# EAGLE board Fan-Module_40mm (EAGLE 9.2.2)
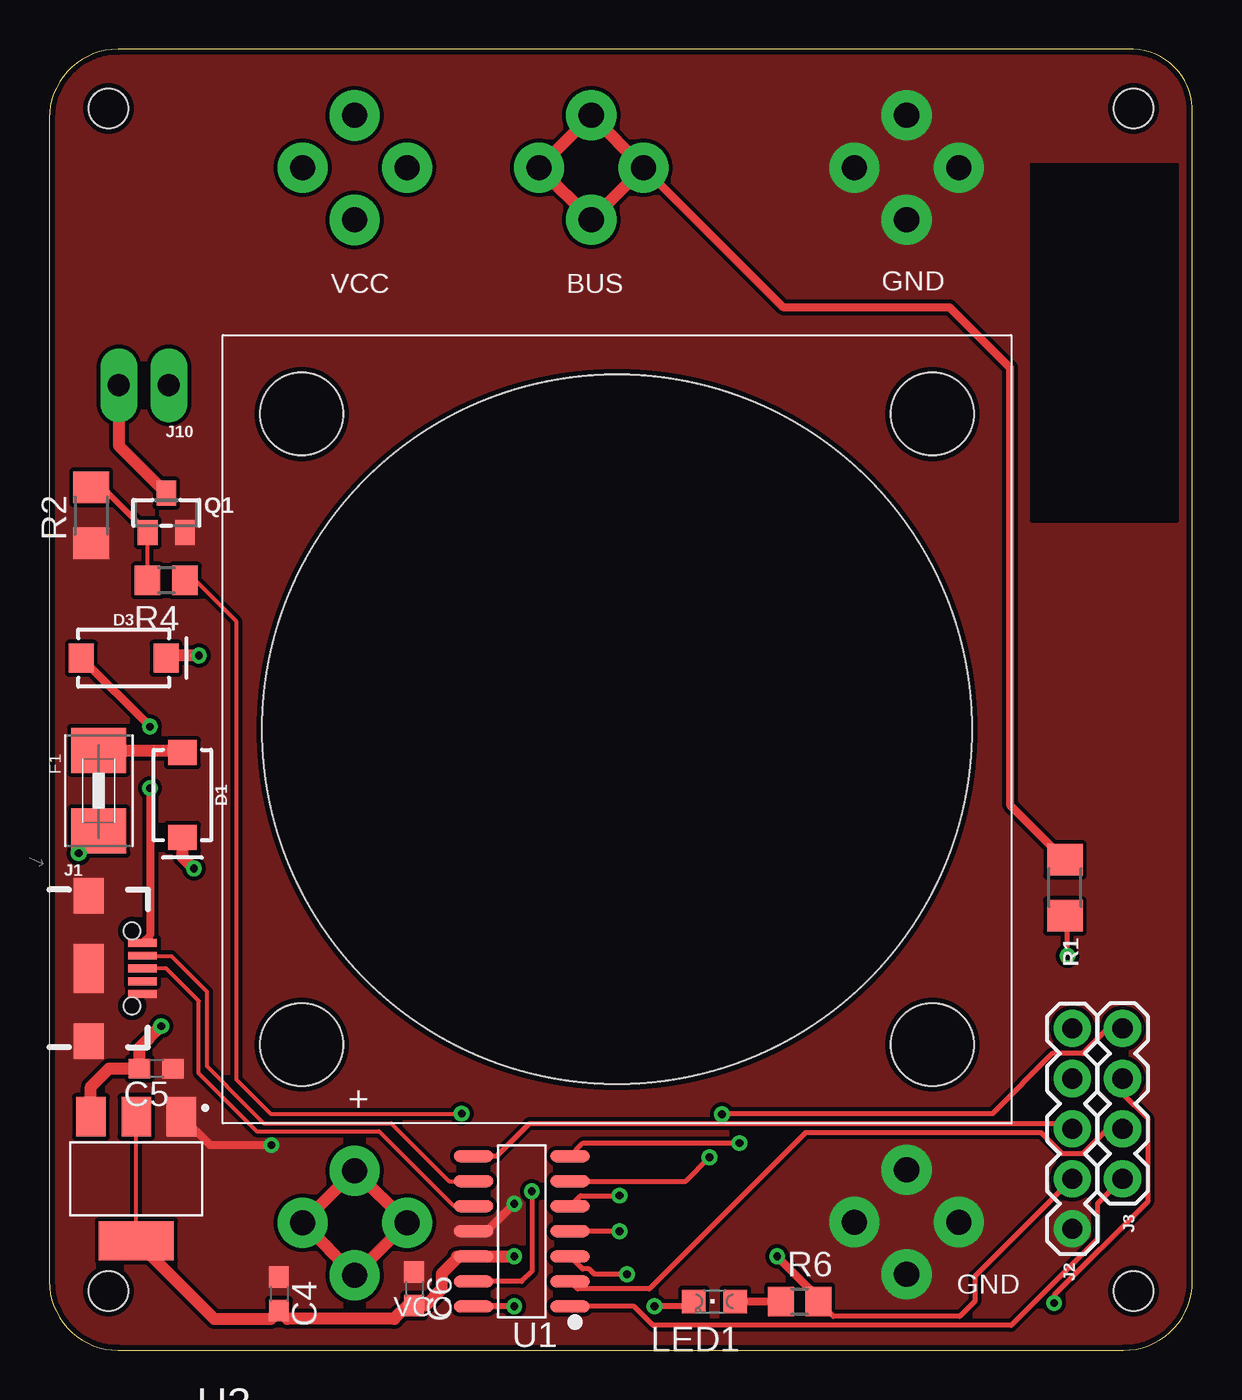
[diagram p0: board, top side]
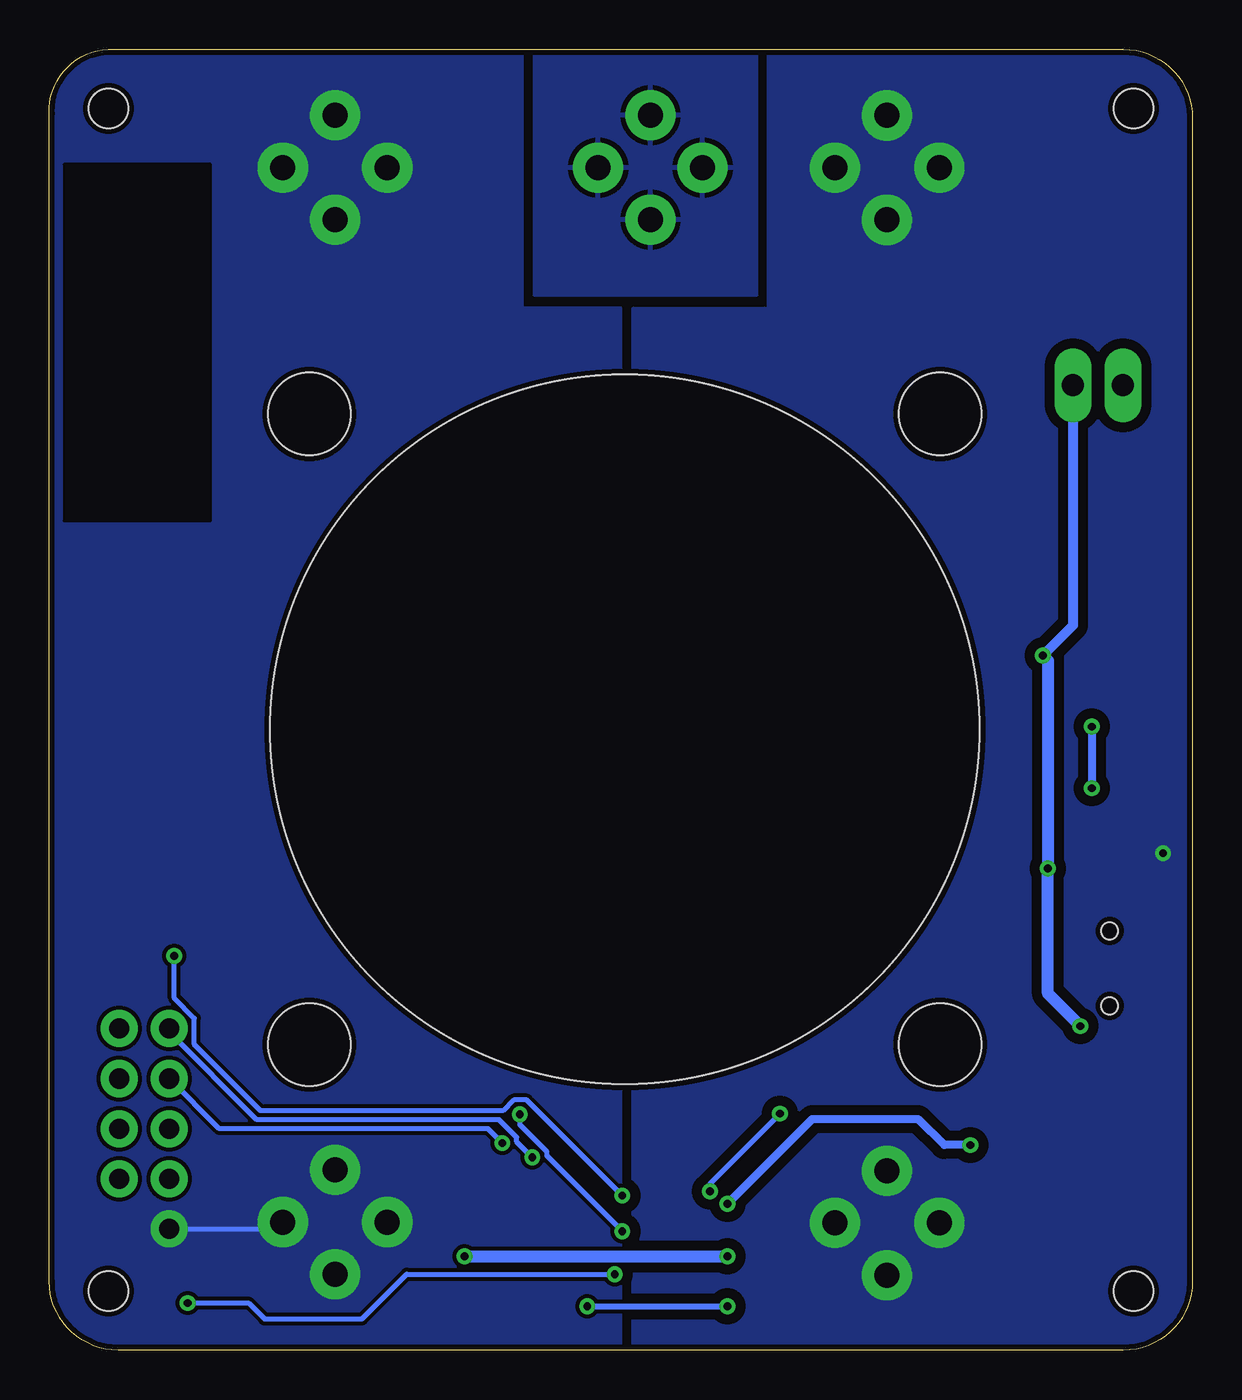
[diagram p1: board, bottom side, seen from below]

Size 58 x 66 mm. Coordinates in mm from the lower left corner, seen from the top.
Outline: 54.5,0 arc90 58,3.5 58,62.75 arc90 55.01,66 3.5,66 arc90 0,62.5 0,3.5 arc90 3.5,0 54.5,0
Copper layers (1*16): Top 0.035mm / dielectric 1.5mm / Bottom 0.035mm
Design rules "led_module *": minimum track width 8mil, minimum drill 15.5mil, track to track 8mil, track to pad 8mil, pad to pad 8mil, via to via 8mil, smd to smd 0mil, copper to edge 11mil, drill to drill 8mil, minimum pad ring 10mil, minimum via ring 8mil, stop-mask expansion 0.116840625mm, vias tented up to drill 20mil, thermal gap 10mil
Net classes: 1 VCC: clearance 0.508 mm
Holes 2 mm at 3,63 55,63 3,3 55,3
tRestrict: area 49.8,42.1 to 57.2,60.2
bRestrict: area 49.8,42.1 to 57.2,60.2

## Footprints (pad centres in the part's own frame; a part is rotated, then mirrored left to right if it is on the bottom)
C0603 = smd 1.1 x 1: 1 -0.85,0; 2 0.85,0
SMA-DIODE = smd 1.27 x 1.47: A -2.15,0; C 2.15,0
1812 = smd 2.286 x 2.794: 1 -2.046,0; 2 2.046,0
FUSE-HOLDER-5X20MM = drill 1.27 pad 2.54: CLIP-INPUT1 -2.65,0; CLIP-INPUT2 2.65,0
USB-B-MICRO-SMD = smd 1.45 x 0.4: D+ 2.725,0; D- 2.725,0.65; GND 2.725,-1.3; ID 2.725,-0.65; VBUS 2.725,1.3 | smd 1.5 x 1.8: SHIELD1 0,3.685; SHIELD2 0,-3.685 | smd 1.5 x 2.5: SHIELD3 0,0 | hole 0.85: 2.2,1.9; 2.2,-1.9
1X05 = drill 1.016 pad 1.88: 1 0,0; 2 2.54,0; 3 5.08,0; 4 7.62,0; 5 10.16,0
1X04 = drill 1.016 pad 1.88: 1 0,0; 2 2.54,0; 3 5.08,0; 4 7.62,0
1X02_LONGPADS = drill 1.118 pad 1.88 long: 1 0,0; 2 2.54,0
CHIPLED_0805 = smd 1.2 x 1.2: A 0,-1.05; C 0,1.05
SOT23-WIDE = smd 1 x 1.27: 1 -0.95,-1; 2 0.95,-1; 3 0,1
R1206 = smd 1.6 x 1.803: 1 -1.422,0; 2 1.422,0
R0805 = smd 1.3 x 1.5: 1 -0.95,0; 2 0.95,0
ATSAMD11C14A-SSUT_SOIC127P600X160-14N = smd 2 x 0.6: 1 -2.45,3.81; 2 -2.45,2.54; 3 -2.45,1.27; 4 -2.45,0; 5 -2.45,-1.27; 6 -2.45,-2.54; 7 -2.45,-3.81; 8 2.45,-3.81; 9 2.45,-2.54; 10 2.45,-1.27; 11 2.45,0; 12 2.45,1.27; 13 2.45,2.54; 14 2.45,3.81
LDL1117S12R_SOT230P700X180-4N = smd 1.5 x 2: 1 -2.3,-3.15; 2 0,-3.15; 3 2.3,-3.15 | smd 3.8 x 2: 4 0,3.15
40MM-FAN = hole 36: 0,0 | hole 4.2: -16,16; 16,16; 16,-16; -16,-16

## Placement (x,y rotation side)
C4  10uF  [C0603]  11.65,2.86 270 top
C5  10uF  [C0603]  5.43,14.29 180 top
C6  1uF  [C0603]  18.51,3.11 270 top
D1  3A/40V/500mV  [SMA-DIODE]  6.76,28.16 270 top
D3  3A/40V/500mV  [SMA-DIODE]  3.78,35.12 0 top
F1  [1812]  2.51,28.38 270 top
GND-CLIP  FUSE-HOLDER-5X20MM  [FUSE-HOLDER-5X20MM]  43.5,60 0 top
GND-CLIP1  FUSE-HOLDER-5X20MM  [FUSE-HOLDER-5X20MM]  43.5,6.5 90 top
GND-CLIP2  FUSE-HOLDER-5X20MM  [FUSE-HOLDER-5X20MM]  43.5,6.5 0 top
GND-CLIP3  FUSE-HOLDER-5X20MM  [FUSE-HOLDER-5X20MM]  43.5,60 90 top
J1  [USB-B-MICRO-SMD]  2,19.37 0 top
J2  [1X05]  51.91,6.16 90 top
J3  [1X04]  54.45,16.32 270 top
J10  [1X02_LONGPADS]  6.06,48.96 180 top
LED1  [CHIPLED_0805]  33.75,2.48 90 top
PWM-CLIP  FUSE-HOLDER-5X20MM  [FUSE-HOLDER-5X20MM]  27.5,60 0 top
PWM-CLIP1  FUSE-HOLDER-5X20MM  [FUSE-HOLDER-5X20MM]  27.5,60 90 top
Q1  [SOT23-WIDE]  5.94,42.48 0 top
R1  2k  [R1206]  51.53,23.46 270 top
R2  2k  [R1206]  2.13,42.35 90 top
R4  499R  [R0805]  5.94,39.05 180 top
R6  59R  [R0805]  38.07,2.48 0 top
U1  ATSAMD11C14A-SSUT_ATSAMD11C14A-SSUT  [ATSAMD11C14A-SSUT_SOIC127P600X160-14N]  23.97,6.03 180 top
U3  LDL1117S12R_LDL1117S12R  [LDL1117S12R_SOT230P700X180-4N]  4.41,8.7 180 top
U$1  [40MM-FAN]  28.8,31.5 0 top
VCC-CLIP  FUSE-HOLDER-5X20MM  [FUSE-HOLDER-5X20MM]  15.5,60 0 top
VCC-CLIP1  FUSE-HOLDER-5X20MM  [FUSE-HOLDER-5X20MM]  15.5,6.46 90 top
VCC-CLIP2  FUSE-HOLDER-5X20MM  [FUSE-HOLDER-5X20MM]  15.5,6.46 0 top
VCC-CLIP3  FUSE-HOLDER-5X20MM  [FUSE-HOLDER-5X20MM]  15.5,59.99 270 bottom

## Library data of the parts
C4-C6 = rcl; SPICEPREFIX: C
D1 D3 = SparkFun-DiscreteSemi; PROD_ID: DIO-09886
F1 = adafruit
GND-CLIP GND-CLIP1-GND-CLIP3 PWM-CLIP PWM-CLIP1 U$1 VCC-CLIP VCC-CLIP1-VCC-CLIP3 = timon-diverses
J1 = SparkFun-Connectors; PROD_ID: CONN-11752
J2 J10 = SparkFun-Connectors
J3 = SparkFun-Connectors; PROD_ID: CONN-09696
LED1 = led
Q1 = microbuilder
R1 R2 R4 R6 = rcl; SPICEPREFIX: R
U1 = LED-Board; AVAILABILITY: Good; DESCRIPTION: Cortex-M0+, 16KB FLASH, 4KB SRAM, USB - 14 SOIC, INDUSTRIAL, GREEN, 1.6-3.6V, 48MHz/ SOIC .150 (SS); MF: Microchip; MP: ATSAMD11C14A-SSUT; PACKAGE: SOIC-14 Microchip; PRICE: 1.18 USD
U3 = LDL1117S12R; AVAILABILITY: Good; DESCRIPTION: 1.2 A High PSRR low dropout linear voltage regulator; MF: STMicroelectronics; MP: LDL1117S12R; PACKAGE: SOT-223 STMicroelectronics; PRICE: 0.22 USD

## Nets
3.3V: C4.2 C6.2 J2.2 R6.2 U1.12 U3.2 U3.4
BUS: PWM-CLIP1.CLIP-INPUT1 PWM-CLIP1.CLIP-INPUT2 PWM-CLIP.CLIP-INPUT1 PWM-CLIP.CLIP-INPUT2 R1.1
FAN: J10.2 Q1.3
GND: C4.1 C5.1 C6.1 GND-CLIP1.CLIP-INPUT1 GND-CLIP1.CLIP-INPUT2 GND-CLIP2.CLIP-INPUT1 GND-CLIP2.CLIP-INPUT2 GND-CLIP3.CLIP-INPUT1 GND-CLIP3.CLIP-INPUT2 GND-CLIP.CLIP-INPUT1 GND-CLIP.CLIP-INPUT2 J1.GND J1.SHIELD1 J1.SHIELD2 J1.SHIELD3 J2.1 Q1.2 R2.1 U1.11 U3.1
N$1: LED1.C U1.14
N$2: LED1.A R6.1
N$3: R1.2 U1.5
N$4: D3.A J1.VBUS
N$5: R4.1 U1.13
N$6: D1.A F1.1
N$7: J3.4 U1.1
N$8: Q1.1 R2.2 R4.2
N$9: J3.3 U1.2
N$10: J3.2 U1.3
N$11: J3.1 U1.4
RESET: J2.5 U1.6
SWCLK: J2.4 U1.7
SWDIO: J2.3 U1.8
USB+: J1.D+ U1.10
USB-: J1.D- U1.9
VCC: C5.2 D1.C D3.C J10.1 U3.3
VCC-RAW [VCC]: F1.2 VCC-CLIP1.CLIP-INPUT1 VCC-CLIP1.CLIP-INPUT2 VCC-CLIP2.CLIP-INPUT1 VCC-CLIP2.CLIP-INPUT2 VCC-CLIP3.CLIP-INPUT1 VCC-CLIP3.CLIP-INPUT2 VCC-CLIP.CLIP-INPUT1 VCC-CLIP.CLIP-INPUT2

## Tracks (layer width: path | path; a pad name or v marks a point on that pad's centre or on a via)
3.3V  (via drill 0.39)
  Top 0.203: U3.4 U3.2
  Top 0.254: J2.2 46.96,3.75 46.96,2.48 46.2,1.71 39.78,1.71 R6.2
  Top 0.406: v36.93,4.76 39.02,2.67 R6.2
  Top 0.61: U3.4 8.38,1.59 11.23,1.59 C4.2 12.07,1.59 17.5,1.59 18.17,2.26 C6.2 19.06,2.26 19.91,3.11 19.91,3.87 20.8,4.76 U1.12 | 20.67,4.76 U1.12 | U1.12 v23.59,4.76
  Bottom 0.61: v36.93,4.76 v23.59,4.76
BUS
  Top 0.406: R1.1 48.74,27.67 48.74,49.85 45.69,52.9 37.25,52.9 PWM-CLIP.CLIP-INPUT2
  Top 0.61: PWM-CLIP.CLIP-INPUT2 | PWM-CLIP.CLIP-INPUT2 PWM-CLIP1.CLIP-INPUT2 | PWM-CLIP1.CLIP-INPUT1 PWM-CLIP.CLIP-INPUT1 PWM-CLIP1.CLIP-INPUT2 | PWM-CLIP.CLIP-INPUT2 PWM-CLIP1.CLIP-INPUT1
  pour Bottom (rank 3): 22.13,66.5 22.13,53.5 33.37,53.5 33.37,66.5
FAN
  Top 0.61: J10.2 3.53,45.9 Q1.3
GND  (via drill 0.39)
  Top 0.305: 6.89,41.15 Q1.2
  Top 0.406: U3.1 8.16,10.41 v11.27,10.41 | v23.59,7.43 22.19,6.03 U1.11
  Bottom 0.254: J2.1 46.49,6.16 GND-CLIP2.CLIP-INPUT2
  Bottom 0.406: v11.27,10.41 12.6,10.41 13.91,11.72 19.3,11.72 v23.59,7.43
  pour Top (rank 2, no thermals): -0.5,66 60.5,66 60.5,0 -0.5,0
  pour Bottom (rank 2, no thermals): 29,52.87 34,52.87 34,66.5 61.5,66.5 61.5,-1 29,-1
N$1  (via drill 0.39)
  Top 0.305: LED1.C 32.45,2.22 v30.7,2.22 | v23.59,2.22 U1.14
  Bottom 0.305: v30.7,2.22 v23.59,2.22
N$2
  Top 0.406: LED1.A R6.1
N$3  (via drill 0.39)
  Top 0.254: U1.5 26.96,7.84 v28.92,7.84 | v51.66,20 51.66,21.91 R1.2
  Bottom 0.254: v28.92,7.84 33.78,12.7 34.43,12.7 34.98,12.15 47.28,12.15 50.64,15.52 50.64,16.85 51.66,17.86 v51.66,20
N$4  (via drill 0.39)
  Top 0.406: D3.A v5.11,31.64 | v5.11,28.51 5.11,21.05 J1.VBUS
  Bottom 0.406: v5.11,31.64 v5.11,28.51
N$5  (via drill 0.39)
  Top 0.203: v20.92,12 11.23,12 9.51,13.73 9.51,36.97 7.42,39.05 R4.1
  Top 0.254: v24.48,8.06 24.48,4 23.97,3.49 U1.13
  Bottom 0.254: v20.92,12 24.48,8.45 v24.48,8.06
N$6
  Top 0.61: D1.A 6.64,30.43 F1.1
N$7
  Top 0.254: J3.4 53.18,7.43 53.18,5.63 48.81,1.26 30.63,1.26 29.67,2.22 U1.1
N$8
  Top 0.203: R4.2 Q1.1
  Top 0.305: R2.2 2.69,43.78 Q1.1
N$9
  Top 0.254: J3.3 53.71,11.24 52.44,9.97 51.39,9.97 50.32,11.04 38.37,11.04 30.45,3.11 26.8,3.11 U1.2
N$10  (via drill 0.39)
  Top 0.254: v50.98,2.4 50.98,2.78 55.72,7.53 55.72,11.77 54.45,13.04 J3.2 | v29.31,3.86 27.65,3.86 27.38,4.12 27.06,4.12 U1.3
  Bottom 0.254: v50.98,2.4 47.89,2.4 47.09,1.59 42.13,1.59 39.87,3.86 v29.31,3.86
N$11  (via drill 0.39)
  Top 0.254: J3.1 53.71,16.32 52.44,15.05 50.9,15.05 47.85,12 34.16,12 v34.13,11.97 | v28.92,6.03 U1.4
  Bottom 0.254: v28.92,6.03 32.77,9.88 32.77,10.08 34.13,11.45 v34.13,11.97
RESET  (via drill 0.39)
  Top 0.254: v33.5,9.78 32.29,8.57 U1.6
  Bottom 0.254: v33.5,9.78 34.29,10.57 34.29,10.81 35.18,11.7 47.47,11.7 51.91,16.14 J2.5
SWCLK  (via drill 0.39)
  Top 0.254: U1.7 27.09,10.51 v35.02,10.51
  Bottom 0.254: v35.02,10.51 35.75,11.24 49.37,11.24 J2.4
SWDIO
  Top 0.254: J2.3 51.66,11.49 24.35,11.49 22.7,9.84 U1.8
USB+
  Top 0.203: U1.10 20.54,7.3 16.73,11.11 10.51,11.11 7.59,14.03 7.59,17.72 5.94,19.37 J1.D+
USB-
  Top 0.203: U1.9 20.29,8.57 17.34,11.52 10.87,11.52 9.01,13.37 9.01,13.4 7.99,14.41 7.99,18.2 6.19,20 4.74,20 J1.D-
VCC  (via drill 0.39)
  Top 0.61: D1.C 6.76,25.03 v7.34,24.45 | v7.59,35.24 6.06,35.24 D3.C | U3.3 2.11,13.37 3.03,14.29 C5.2 4.58,15.34 v5.68,16.45
  Bottom 0.508: J10.1 6.06,36.77 v7.59,35.24
  Bottom 0.61: v7.59,35.24 7.34,34.99 v7.34,24.45 7.34,18.1 v5.68,16.45
VCC-RAW  (via drill 0.39)
  Top 0.61: VCC-CLIP1.CLIP-INPUT1 | VCC-CLIP1.CLIP-INPUT1 VCC-CLIP2.CLIP-INPUT2 VCC-CLIP1.CLIP-INPUT2 VCC-CLIP2.CLIP-INPUT1 VCC-CLIP1.CLIP-INPUT1 | F1.2 2.51,26.23 v1.49,25.21
  pour Bottom (no thermals): -1.53,66.34 -1.53,-0.81 28.38,-0.81 28.38,52.88 21.52,52.88 21.52,66.34

## Text on the board
tPlace: +
tNames: VCC | BUS | GND | GND | VCC